# Altium PCB relais_schaltung.PcbDoc
Units mil, origin at the board's own origin, x right, y up, seen from the top; angles counter-clockwise.
Board outline 2270.03 x 1600.03 mil, 2 copper layers (Top Layer, Bottom Layer); 7 components, 9 nets, 49 pads, 0 vias.
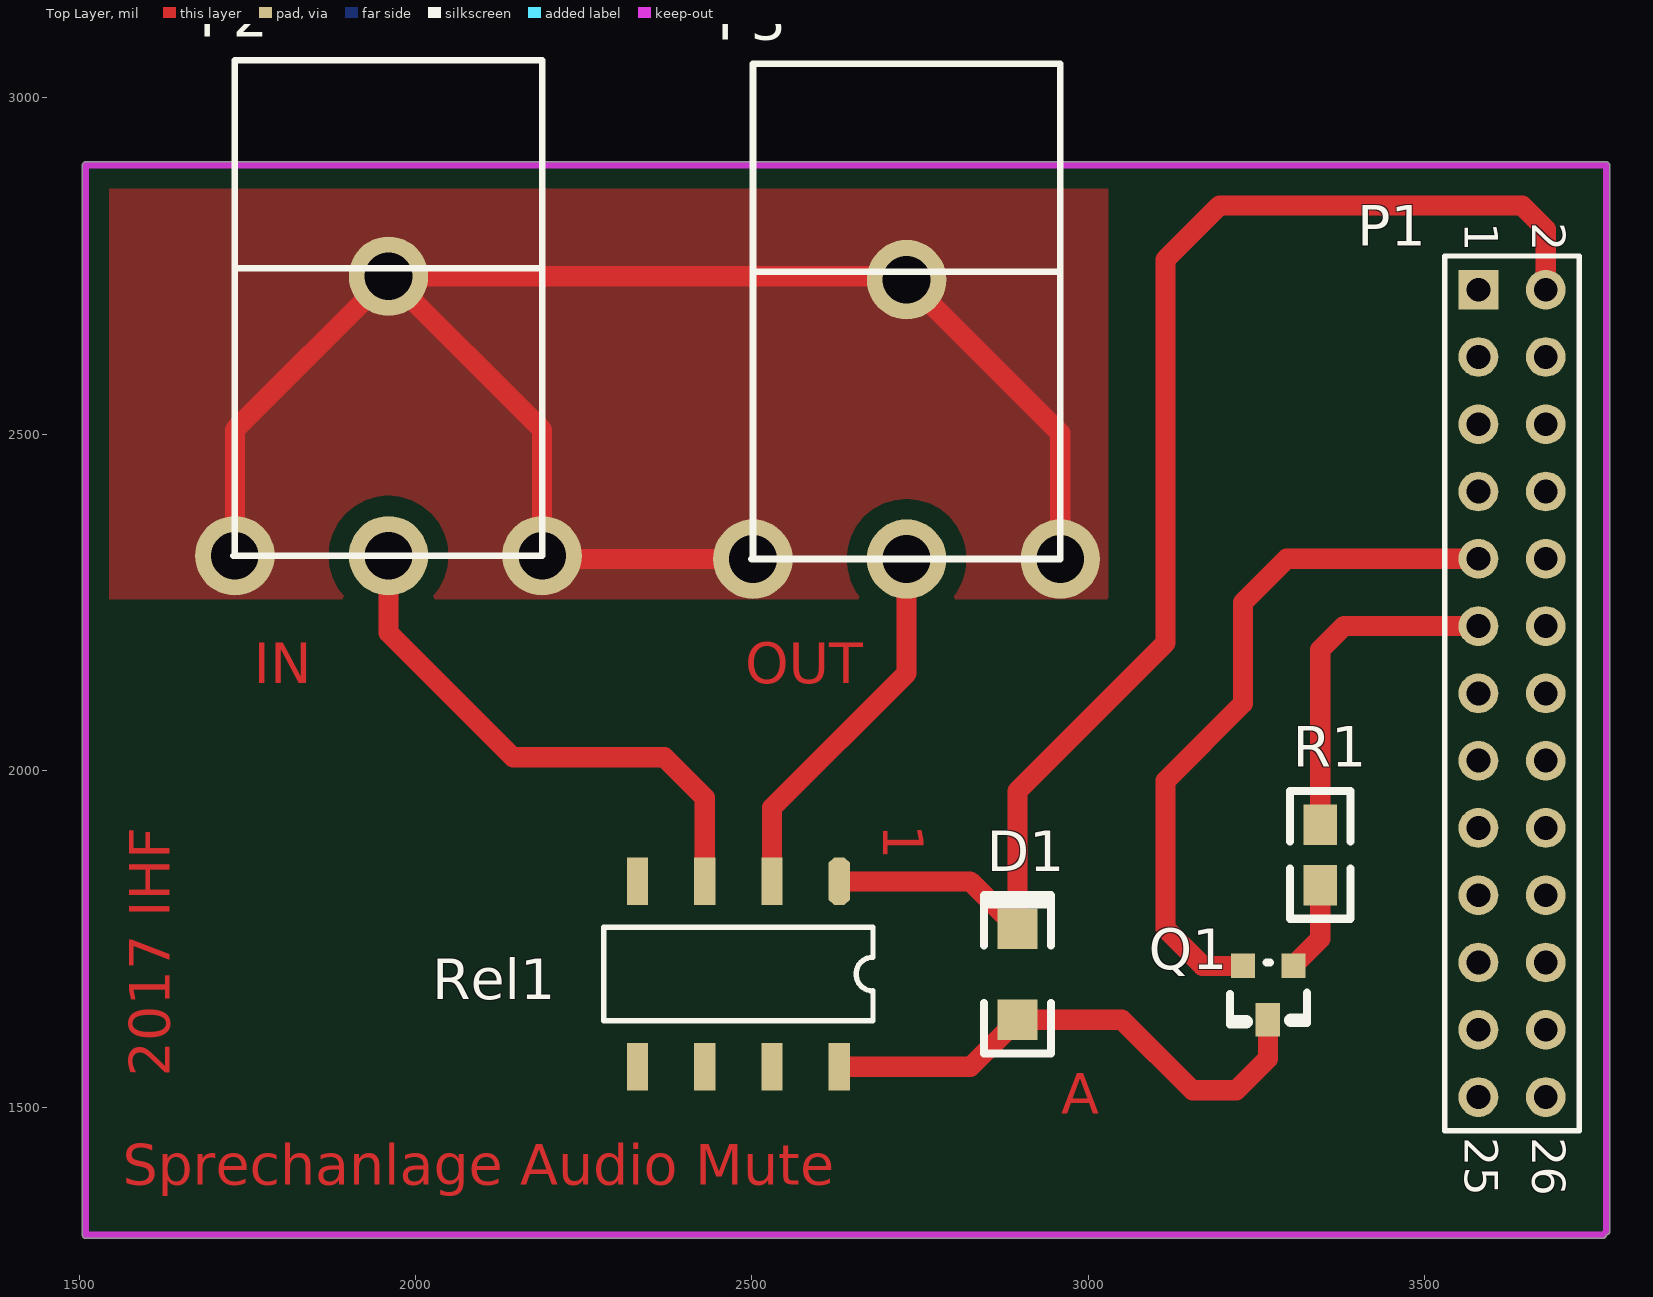
[diagram p0: Top Layer view]
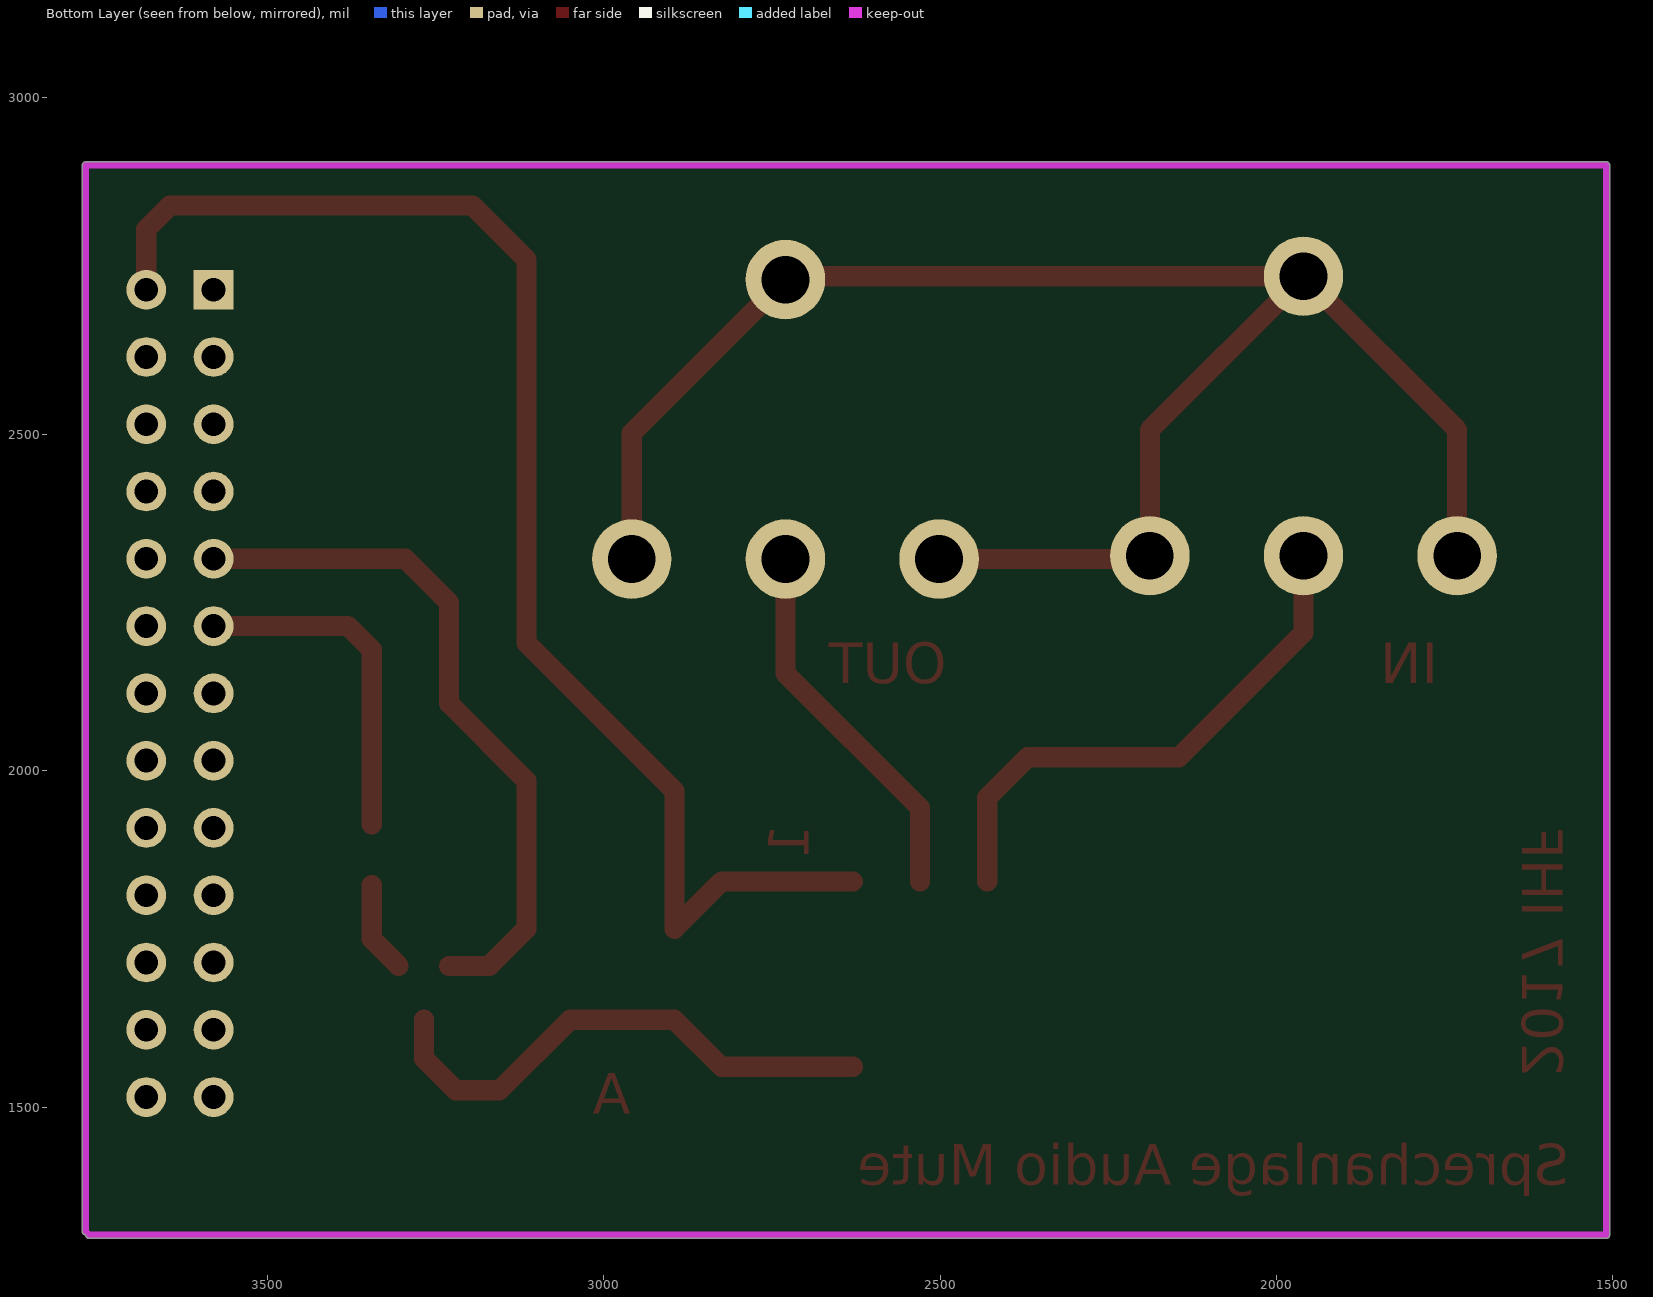
[diagram p1: Bottom Layer view, seen from below]

## Layer stack, top to bottom
Top Solder: solder mask 0.4, Solder Resist, Dk 3.5
Top Layer: signal copper 1.4
Dielectric 1: dielectric 12.6, FR-4, Dk 4.8
Bottom Layer: signal copper 1.4
Bottom Solder: solder mask 0.4, Solder Resist, Dk 3.5

## Board outline
1504.98,1310 ccw(c1510,1310) 1510,1304.98 3765,1304.98 ccw(c3765,1310) 3770.01,1309.98 ccw(c3770,1315) 3775.01,1315 3775.01,2900 ccw(c3770,2900) 3770,2905.01 1510,2905.01 ccw(c1510,2900) 1504.98,2900

## Design rules (kind name [scope] priority, off if disabled: settings)
Clearance [All] p1: gap=30
PolygonConnect [All] p1: connectstyle=Direct reliefconductorwidth=10 reliefentries=4 polygonreliefangle="90 Angle" airgapwidth=10
RoomDefinition relais_schaltung [InComponentClass('relais_schaltung')] p1: confinementstyle=ConfineIn formatcopy=TRUE lockcomponents=FALSE outline 1515,1295 3770,1295 3770,2895 1515,2895
RoutingVias [All] p1: holewidth=28 width=50 viastyle="Through Hole" minholewidth=28 minwidth=50 maxholewidth=28 maxwidth=50
SolderMaskExpansion [All] p1: expansion=4
Width [All] p1: maxlimit=50 minlimit=30 preferedwidth=30
30 further rules are at their usual default settings.

## Components (designator, comment, footprint, x,y, rotation, side; value= is the part's Value field where it differs from the comment)
D1 "1LL4148" 1206 2895,1630 r90 top
P1 "GPIO RaspberryPi" HDR2X13 3580,2715 r270 top
P2 "CBP-G" Cinch 1960,2319.65 r0 top
P3 "CBP-G" Cinch 2730,2314.65 r0 top
Q1 "BC847CLT1" SOT-23 3305,1710 r180 top
R1 "" 0805 3345,1920 r270 top
Rel1 "G6K-2F" G6K-2F 2630,1835.59 r270 top

## Footprints (in the part's own frame and the unit in brackets; to place one, negate y for a bottom-side part, rotate by r counter-clockwise, add the part's x,y. Pads: shape width x height; smd on the part's side, far side on the other; paste and mask are expansions set on the pad)
0805 [mil]
  rect 60x50 smd: 1(0,0) 2(90,0)
  silkscreen extent -50,-45 140,45
1206 [mil]
  rect 60x60 smd: 1(0,0) 2(135,0)
  silkscreen extent -50,-50 185,50
Cinch [mm]
  round 3 hole 1.8: 1(0,0) 2(-5.8,0) 2(0,10.55) 2(5.8,0)
  silkscreen extent -5.85,0 5.8,18.7
G6K-2F [mm]
  oct 1.8x0.8 smd: 1(0,0)
  rect 1.8x0.8 smd: 2(0,-2.54) 3(0,-5.08) 4(0,-7.62) 5(7,-7.62) 6(7,-5.08) 7(7,-2.54) 8(7,0)
  silkscreen extent 1.73,-8.89 5.27,1.27
HDR2X13 [mm] "Connector; Header; 13x2 Position"
  rect 1.5x1.5 hole 0.9: 1(0,0)
  round 1.5 hole 0.9: 2(0,2.54) 3(2.54,0) 4(2.54,2.54) 5(5.08,0) 6(5.08,2.54) 7(7.62,0) 8(7.62,2.54) 9(10.16,0) 10(10.16,2.54) 11(12.7,0) 12(12.7,2.54) 13(15.24,0) 14(15.24,2.54) 15(17.78,0) 16(17.78,2.54) 17(20.32,0) 18(20.32,2.54) 19(22.86,0) 20(22.86,2.54) 21(25.4,0) 22(25.4,2.54) 23(27.94,0) 24(27.94,2.54) 25(30.48,0) 26(30.48,2.54)
  silkscreen extent -1.27,-1.27 31.75,3.81
SOT-23 [mil]
  rect 36x36 smd: 1(0,0) 2(75,0)
  rect 36x50 smd: 3(38,80)
  silkscreen extent -20,-5 94,87

## Part data
D1: library part 1N4148, "Diode"
P1: library part "Header 13X2", "Header, 13-Pin, Dual row"
P2 P3: library part "Cinch Print"
Q1: "General Purpose Transistor NPN Silicon"
R1: library part Res2, "Resistor"

## Nets (pads, with @x,y where several pads share a name; then routed paths per layer and width w, separated by ;. In a path a pad name is that pad's centre, name@x,y a point inside that pad or via, vN(x,y) a via of type N, cw(c..) or ccw(c..) an arc to the next point about the centre after c; other vN are vias at no path point)
AGND: P2.2 P3.2 | length 2617.3
  Top Layer w30: P2.2@1731.65,2319.65 1731.65,2506.65 P2.2@1960,2735 ; P3.2@2501.65,2314.65 2193.35,2314.65 2188.35,2319.65 2188.35,2506.65 P2.2@1960,2735 ; P3.2@2958.35,2314.65 2958.35,2501.65 2730,2730 2725,2735 P2.2@1960,2735
AUDIOIN: P2.1 Rel1.3 | length 810.5
  Top Layer w30: P2.1 1960,2205 2145,2020 2370,2020 2430,1960 Rel1.3
AUDIOOUT: P3.1 Rel1.2 | length 561.9
  Top Layer w30: Rel1.2 2530,1945 2730,2145 P3.1
COIL-: D1.1 Q1.3 Rel1.8 | length 787
  Top Layer w30: Rel1.8 2825,1560 D1.1 3050,1630 3155,1525 3220,1525 3267,1572 Q1.3
GND: P1.9 Q1.2 | length 1047.3
  Top Layer w30: Q1.2 3170,1710 3115,1765 3115,1985 3230,2100 3230,2250 3295,2315 P1.9
GPIO17: P1.11 R1.1 | length 509.5
  Top Layer w30: R1.1 3345,2180 3380,2215 P1.11
NetQ1_1: Q1.1 R1.2 | length 136.6
  Top Layer w30: Q1.1 3345,1750 R1.2
VCC_3V3: P1.1
VCC_5V: D1.2 P1.2 Rel1.1 | length 2083
  Top Layer w30: Rel1.1 2824.41,1835.59 D1.2 2895,1970 3115,2190 3115,2760 3195,2840 3645,2840 3680,2805 P1.2
pads on no net: P1.3 P1.4 P1.5 P1.6 P1.7 P1.8 P1.10 P1.12 P1.13 P1.14 P1.15 P1.16 P1.17 P1.18 P1.19 P1.20 P1.21 P1.22 P1.23 P1.24 P1.25 P1.26 Rel1.4 Rel1.5 Rel1.6 Rel1.7

## Polygon pours and split planes (outlines as drawn)
AGND on Top Layer "AGND" (solid, remove dead copper, pour order 0): 1510,2900 3030,2900 3030,2260 3035,2255 1510,2255 1510,2885 1510,2900

## Keep-outs
Keep-Out Layer:
  lines w10: 1510,1310 1510,2900 3770,2900 3770,1315 3765,1310 1510,1310

## Other copper
Top Layer:
  text "IN" at 1760,2130 h60
  text "OUT" at 2490,2130 h60
  text "2017 IHF" at 1635,1545 h60 r90
  text "A" at 2960,1490 h60
  text "Sprechanlage Audio Mute" at 1565,1385 h60

## Text inside footprints (layer, text, board x,y; h text height)
P1: Top Overlay "2" at 3660,2815 h50 r270; Top Overlay "1" at 3560,2815 h50 r270; Top Overlay "25" at 3560,1455 h50 r270; Top Overlay "26" at 3660,1455 h50 r270
Rel1: Top Layer "1" at 2695,1920.59 h60 r270